# Altium PCB joystick_if.PcbDoc
Units mil, origin at the board's own origin, x right, y up, seen from the top; angles counter-clockwise.
Board outline 744.09 x 629.92 mil, 2 copper layers (Top Layer, Bottom Layer), stack 27.1 mil thick; 14 components, 8 nets, 53 pads, 18 vias.
Unrouted connection lines stored in the file: 2.
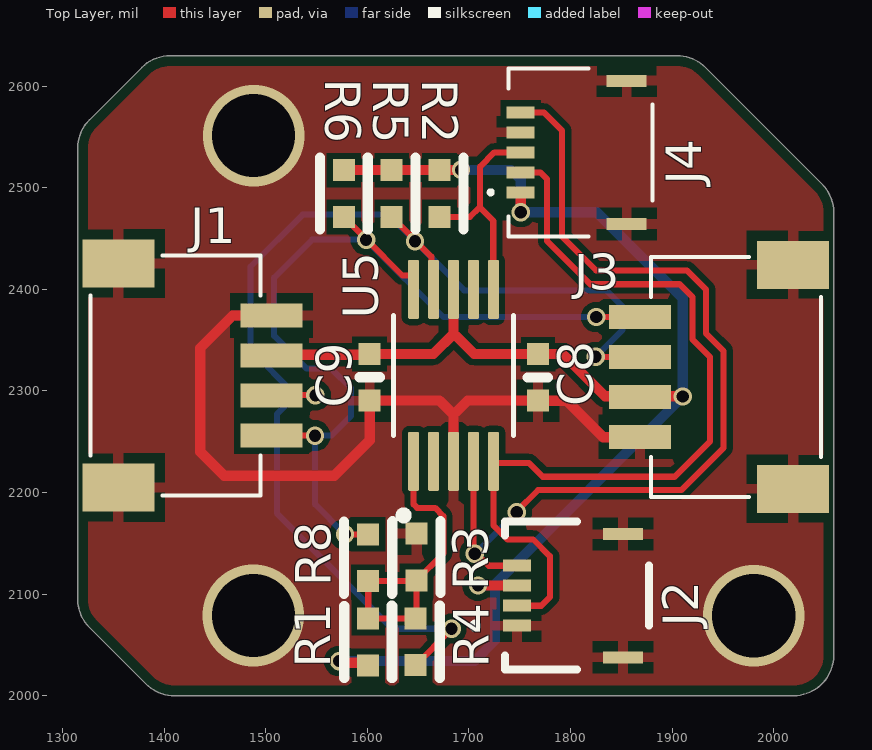
[diagram p0: Top Layer view]
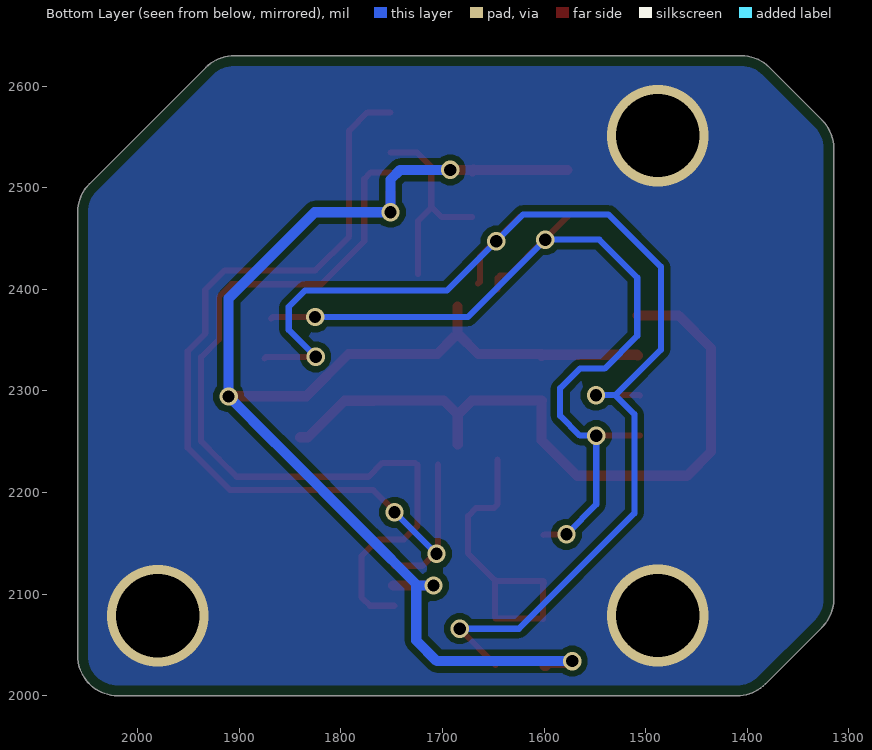
[diagram p1: Bottom Layer view, seen from below]
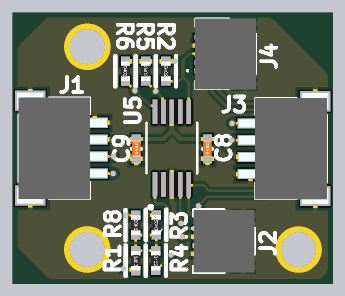
[diagram p2: 3D render of the assembled board from above, using the file's embedded part models]

## Layer stack, top to bottom
Top Solder: solder mask 0.4, Solder Resist, Dk 3.5
Top Layer: signal copper 1.4
Dielectric 2: prepreg 4.3, PP-006, Dk 4.1
Dielectric 1: dielectric 15.7, FR-4, Dk 4.4
Dielectric 3: prepreg 4.3, PP-006, Dk 4.1
Bottom Layer: signal copper 1.4
Bottom Solder: solder mask 0.4, Solder Resist, Dk 3.5

## Board outline
1326.49,2067.21 cw(c1354.33,2095.05) 1314.96,2095.05 1314.96,2538.81 cw(c1354.33,2538.81) 1326.49,2566.65 1378.23,2618.39 cw(c1406.07,2590.55) 1406.07,2629.92 1904.95,2629.92 cw(c1904.95,2590.55) 1932.79,2618.39 2047.52,2503.66 cw(c2019.69,2475.82) 2059.06,2475.82 2059.06,2039.37 cw(c2019.68,2039.37) 2019.68,2000 1410.01,2000 cw(c1410.01,2039.37) 1382.17,2011.53

## Design rules (kind name [scope] priority, off if disabled: settings)
BoardOutlineClearance [All] p1: gap=10 ignorepadtopadclearanceinfootprint=FALSE except(0: Arc-SplitContinuation Track-SplitContinuation SMDPad-SplitContinuation THPad-SplitContinuation Via-SplitContinuation Fill-SplitContinuation Poly-SplitContinuation Region-SplitContinuation Text-SplitContinuation)
Clearance [All] p1: gap=6 ignorepadtopadclearanceinfootprint=FALSE
ComponentClearance [All] p1: gap=10 collisioncheckmode=3 verticalgap=10 showdistances=FALSE donotcheckwithout3dbody=TRUE
DiffPairsRouting [All] p1: maxlimit=8 minlimit=4 mostfreqgap=5 toplayer_minwidth=5 toplayer_maxwidth=25 toplayer_prefwidth=9 bottomlayer_minwidth=5 bottomlayer_maxwidth=25 bottomlayer_prefwidth=9 maxuncoupledlength=500
HoleSize [All] p1: absolutevalues=TRUE maxlimit=100 minlimit=7 maxpercent=80.000 minpercent=20.000
MinimumSolderMaskSliver [All] p1: minsoldermaskwidth=0
PolygonConnect PolygonConnect_1 [All] p1: thpad.connectstyle=Relief thpad.reliefconductorwidth=10 thpad.reliefentries=4 thpad.polygonreliefangle="90 Angle" thpad.airgapwidth=10 smdpad.connectstyle=Relief smdpad.reliefconductorwidth=10 smdpad.reliefentries=4 smdpad.polygonreliefangle="90 Angle" smdpad.airgapwidth=10 via.connectstyle=Direct via.reliefconductorwidth=10 via.reliefentries=4 via.polygonreliefangle="90 Angle" via.airgapwidth=10
RoutingVias [All] p1: holewidth=8 width=50 viastyle="Through Hole" minholewidth=7 minwidth=10 maxholewidth=100 maxwidth=200
SilkToSilkClearance [All] p1: silktosilkclearance=1
SilkToSolderMaskClearance [IsPad] p1: minsilkscreentomaskgap=1 clearancetoexposedcopper=TRUE
SolderMaskExpansion [All] p1: expansion=4 istentingtop=FALSE
Width [All] p1: maxlimit=100 minlimit=4 preferedwidth=6 toplayer_minwidth=6 minimp=50.000000 maximp=50.000000 favimp=50.000000
24 further rules are at their usual default settings.

## Components (designator, comment, footprint, x,y, rotation, side; value= is the part's Value field where it differs from the comment)
C8 "1µF" SMD-0402C 1768.03,2313.31 r0 top
C9 "0.10µF" SMD-0402C 1602.29,2313.35 r0 top
J1 "SM04B-SRSS-TB(LF)(SN)" 4208 1327.92,2316.18 r270 top
J2 "5034800440" 5034800440 1806.46,2098.36 r90 top
J3 "SM04B-SRSS-TB(LF)(SN)" 4208 2046.21,2312.82 r90 top
J4 "5034800540" 5034800540 1810.12,2534.69 r90 top
R1 "0.0" SMD-0402-RES 1600.95,2052.72 r180 top
R2 "47k" SMD-0402-RES 1671.1,2494.25 r180 top
R3 "0.0" SMD-0402-RES 1648.45,2136.38 r0 top
R4 "0.0" SMD-0402-RES 1647.67,2053.07 r180 top
R5 "4.7k" SMD-0402-RES 1623.96,2494.25 r180 top
R6 "4.7k" SMD-0402-RES 1576.98,2494.22 r180 top
R8 "0.0" SMD-0402-RES 1600.64,2135.75 r0 top
U5 "ADS1015IDGST" SOP50P490X110-10N 1685.01,2315.25 r90 top

## Footprints (in the part's own frame and the unit in brackets; to place one, negate y for a bottom-side part, rotate by r counter-clockwise, add the part's x,y. Pads: shape width x height; smd on the part's side, far side on the other; paste and mask are expansions set on the pad)
4208 [mm]
  rect 0.6x1.55 smd: 1(-1.475,4.515) 2(-0.475,4.515) 3(0.525,4.515) 4(1.525,4.515)
  rect 1.2x1.8 smd: 5(-2.775,0.69) 6(2.825,0.69)
  silkscreen extent -2.97,-0.01 3.03,4.24, body extent -3.25,-0.09 3.31,5.23, height 3.15
5034800440 [mm]
  rect 0.3x0.7 smd: 1(-0.75,1.5) 2(-0.25,1.5) 3(0.25,1.5) 4(0.75,1.5)
  rect 0.3x1 smd: MP1(-1.54,-1.15) MP2(1.54,-1.15)
  silkscreen extent -1.85,-1.8 1.85,2.6, body extent -1.85,-1.8 1.85,1.82, height 2.22
5034800540 [mm]
  rect 0.3x0.7 smd: 1(-1,1.5) 2(-0.5,1.5) 3(0,1.5) 4(0.5,1.5) 5(1,1.5)
  rect 0.3x1 smd: MP1(-1.79,-1.15) MP2(1.79,-1.15)
  silkscreen extent -2.1,-1.8 2.1,2.3, body extent -2.1,-1.8 2.1,1.82, height 1.3
SMD-0402-RES [mm]
  rect 0.55x0.55 smd: 1(0,0.584) 2(0,-0.584)
  silkscreen extent -0.6,-0.9 0.6,0.9, body extent -0.28,-0.57 0.27,0.58, height 0.41
SMD-0402C [mm]
  rect 0.55x0.55 smd: 1(0,0.584) 2(0,-0.584)
  silkscreen extent -0.25,0 0.25,0, body extent -0.25,-0.51 0.25,0.51, height 0.51
SOP50P490X110-10N [mm]
  rrect25% 1.47x0.28 smd: 1(-2.15,1) 2(-2.15,0.5) 3(-2.15,0) 4(-2.15,-0.5) 5(-2.15,-1) 6(2.15,-1) 7(2.15,-0.5) 8(2.15,0) 9(2.15,0.5) 10(2.15,1)
  silkscreen extent -3.6,-1.5 1.5,1.5

## Part data
C8: library part GRM155R61A105KE15D, "CAP CER 1UF 10V X5R 0402", Digi-Key Part Number=490-3890-1-ND, Manufacturer="Murata Electronics North America", Operating Temperature="-55°C ~ 85°C", Package / Case="0402 (1005 Metric)", Ratings=-, Temperature Coefficient=X5R, Tolerance=±10%, Voltage=10V, @ qty=0, Applications="General Purpose", Datasheets=http://www.murata.com/~/media/webrenewal/support/library/catalog/products/capacitor/mlcc/c02e.pdf, Factory Stock=0, Features=-, Height - Seated (Max)=-, Image=//media.digikey.com/Renders/Murata%20Renders/ZRB-SERIES-0402.jpg, Lead Spacing=-, Lead Style=-, Minimum Quantity=1, Mounting Type="Surface Mount, MLCC", Packaging="Cut Tape (CT)", Part Number=GRM155R61A105KE15D, Part Status=Active, Quantity Available=6162668, Series=GRM, Size / Dimension="0.039\" L x 0.020\" W (1.00mm x 0.50mm)", Thickness (Max)="0.022\" (0.55mm)", Unit Price (USD)=0.1
C9: library part GRM152R61A104KE19D, "CAP CER 0.1UF 10V X5R 0402", Digi-Key Part Number=490-10008-1-ND, Manufacturer="Murata Electronics North America", Operating Temperature="-55°C ~ 85°C", Package / Case="0402 (1005 Metric)", Ratings=-, Temperature Coefficient=X5R, Tolerance=±10%, Voltage=10V, @ qty=0, Applications="General Purpose", Datasheets=http://www.murata.com/~/media/webrenewal/support/library/catalog/products/capacitor/mlcc/c02e.pdf, Factory Stock=0, Features="Derating Recommended", Height - Seated (Max)=-, Image=//media.digikey.com/Renders/Murata%20Renders/ZRB-SERIES-0402.jpg, Lead Spacing=-, Lead Style=-, Minimum Quantity=1, Mounting Type="Surface Mount, MLCC", Packaging="Cut Tape (CT)", Part Number=GRM152R61A104KE19D, Part Status=Active, Quantity Available=80241, Series=GRM, Size / Dimension="0.039\" L x 0.020\" W (1.00mm x 0.50mm)", Thickness (Max)="0.009\" (0.22mm)", Unit Price (USD)=0.16
J1 J3: library part 4208
R1 R3 R4 R8: library part ERJ-2GE0R00X, "RES SMD 0.0OHM JUMPER 1/10W 0402", Digi-Key Part Number=P0.0JCT-ND, Manufacturer="Panasonic Electronic Components", Operating Temperature="-55°C ~ 155°C", Package / Case="0402 (1005 Metric)", Power (Watts)="0.1W, 1/10W", Supplier Device Package=0402, Temperature Coefficient=-, Tolerance=Jumper, @ qty=1500, Composition="Thick Film", Datasheets=http://industrial.panasonic.com/www-cgi/jvcr13pz.cgi?E+PZ+3+AOA0001+ERJ2GE0R00X+7+WW, Factory Stock=0, Failure Rate=-, Features="Automotive AEC-Q200", Height - Seated (Max)="0.016\" (0.40mm)", Image=//media.digikey.com/Photos/Panasonic%20Photos/ERJ-PA2-Series.jpg, Minimum Quantity=1, Number of Terminations=2, Packaging="Cut Tape (CT)", Part Number=ERJ-2GE0R00X, Part Status=Active, Quantity Available=3152483, Series=ERJ, Size / Dimension="0.039\" L x 0.020\" W (1.00mm x 0.50mm)", Unit Price (USD)=0.00384
R2: library part ERJ-2GEJ473X, "RES SMD 47K OHM 5% 1/10W 0402", Digi-Key Part Number=P47KJCT-ND, Manufacturer="Panasonic Electronic Components", Operating Temperature="-55°C ~ 155°C", Package / Case="0402 (1005 Metric)", Power (Watts)="0.1W, 1/10W", Supplier Device Package=0402, Temperature Coefficient=±200ppm/°C, Tolerance=±5%, @ qty=1500, Composition="Thick Film", Datasheets=http://industrial.panasonic.com/www-cgi/jvcr13pz.cgi?E+PZ+3+AOA0001+ERJ2GEJ473X+7+WW, Factory Stock=0, Failure Rate=-, Features="Automotive AEC-Q200", Height - Seated (Max)="0.016\" (0.40mm)", Image=//media.digikey.com/Photos/Panasonic%20Photos/ERJ-PA2-Series.jpg, Minimum Quantity=1, Number of Terminations=2, Packaging="Cut Tape (CT)", Part Number=ERJ-2GEJ473X, Part Status=Active, Quantity Available=5182645, Series=ERJ, Size / Dimension="0.039\" L x 0.020\" W (1.00mm x 0.50mm)", Unit Price (USD)=0.00350
R5 R6: library part ERJ-2GEJ472X, "RES SMD 4.7K OHM 5% 1/10W 0402", Digi-Key Part Number=P4.7KJCT-ND, Manufacturer="Panasonic Electronic Components", Operating Temperature="-55°C ~ 155°C", Package / Case="0402 (1005 Metric)", Power (Watts)="0.1W, 1/10W", Supplier Device Package=0402, Temperature Coefficient=±200ppm/°C, Tolerance=±5%, @ qty=1500, Composition="Thick Film", Datasheets=http://industrial.panasonic.com/www-cgi/jvcr13pz.cgi?E+PZ+3+AOA0001+ERJ2GEJ472X+7+WW, Factory Stock=0, Failure Rate=-, Features="Automotive AEC-Q200", Height - Seated (Max)="0.016\" (0.40mm)", Image=//media.digikey.com/Photos/Panasonic%20Photos/ERJ-PA2-Series.jpg, Minimum Quantity=1, Number of Terminations=2, Packaging="Cut Tape (CT)", Part Number=ERJ-2GEJ472X, Part Status=Active, Quantity Available=8551774, Series=ERJ, Size / Dimension="0.039\" L x 0.020\" W (1.00mm x 0.50mm)", Unit Price (USD)=0.00350
U5: "12-Bit, 3.3kSPS, 4-Ch Delta-Sigma ADC With PGA, Oscillator, VREF, Comparator and I2C Interface 10-VSSOP -40 to 125", Package="VSSOP-10 Texas Instruments", Availability=Good, DigiKey-Purchase-URL=https://snapeda.com/shop?store=DigiKey&id=425936, MF="Texas Instruments", Mouser-Purchase-URL=https://snapeda.com/shop?store=Mouser&id=425936, MP=ADS1015IDGST, Price=None, SnapEDA_Link=https://www.snapeda.com/parts/ADS1015IDGST/Texas%20Instruments/view-part/425936/?ref=snap, Texas_Instruments-Purchase-URL=https://snapeda.com/shop?store=Texas+Instruments&id=425936

## Via types
v1: diameter 18, hole 12, Top Layer to Bottom Layer, tented both sides, 15 vias
v2: diameter 100, hole 82, Top Layer to Bottom Layer, 3 vias

## Nets (pads, with @x,y where several pads share a name; then routed paths per layer and width w, separated by ;. In a path a pad name is that pad's centre, name@x,y a point inside that pad or via, vN(x,y) a via of type N, cw(c..) or ccw(c..) an arc to the next point about the centre after c; other vN are vias at no path point)
GND: C8.2 C9.2 J1.1 J1.5 J1.6 J2.1 J2.MP1 J2.MP2 J3.1 J3.5 J3.6 J4.4 J4.MP1 J4.MP2 R3.1 U5.3 | length 705
  Top Layer w6: C8.2@1767.76,2290.58 C8.2
  Top Layer w10: J1.1@1507.75,2374.11 1467.54,2374.11 1435.62,2342.19 1435.62,2240.06 1459.18,2216.49 1567.54,2216.49 1602.48,2251.44 C9.2@1602.48,2287.2 ; C9.2 1671.2,2290.35 1685.01,2276.54 U5.3@1685.01,2247.4 ; 1686.98,2278.78 1698.78,2290.58 C8.2@1767.76,2290.58 ; C8.2 1796.35,2290.31 1832.29,2254.37 J3.1@1840.15,2254.37
  other v2: 1487.96,2078.91 1980.29,2078.74 1488.12,2551.26
JS_BTN: J4.3 R2.1 U5.6 | length 200.9
  Top Layer w6: R2.1 1701.1,2471.25 1710.58,2480.73 1724,2467.31 U5.6@1724,2415 ; 1710.99,2480.32 1710.99,2520.55 1725.14,2534.69 J4.3
JS_X: J2.4 J4.5 U5.4 | length 901.6
  Top Layer w6: U5.4@1704.52,2227.68 1704.52,2141.07 v1(1705.89,2139.7) 1707.72,2139.7 1719.53,2127.89 J2.4 ; v1@1746.65,2180.89 1768.05,2202.28 1909.01,2202.28 1950.66,2243.93 1950.66,2339.18 1933.51,2356.33 1933.51,2399.52 1914.45,2418.57 1825.16,2418.57 1791.84,2451.89 1791.84,2556.07 1773.85,2574.06 J4.5
  Bottom Layer w6: v1(1705.89,2139.7) 1706.1,2139.7 1746.89,2180.5 v1(1747.1,2180.5)
JS_Y: J2.2 J4.2 U5.5 | length 839.1
  Top Layer w6: U5.5@1724.38,2227.24 1724.38,2167.44 1737.99,2153.83 1763.11,2153.83 1779.77,2137.17 1779.77,2097.03 1771.26,2088.52 J2.2 ; U5.5@1726.93,2229.04 1759.08,2229.04 1772.69,2215.43 1902.53,2215.43 1919.93,2232.83 1937.52,2250.42 1937.52,2333.1 1919.93,2350.69 1919.93,2392.5 1907.48,2404.95 1819.5,2404.95 1777.01,2447.44 1777.01,2508.36 1770.37,2515.01 J4.2
NetR1_2: R1.2 R3.2 R4.2 R8.2 U5.1 | length 315.6
  Top Layer w6: R8.2@1599.94,2110.72 1600.95,2109.71 R1.2 ; R8.2 1646.47,2112.75 R3.2@1647.2,2113.49 ; R1.2@1602.7,2076.04 R4.2@1647.64,2076.04 ; U5.1@1645.67,2232.57 1645.67,2188.37 1649.18,2184.85 1666.75,2184.85 1674.82,2176.78 1674.82,2139.76 R3.2 R4.2@1648.45,2077.6
SCL: J1.4 J3.4 R6.1 R8.1 U5.10 | length 909.4
  Top Layer w6: J1.4 1505.91,2255.89 v1@1547.94,2255.89 ; R6.1 1599.14,2449.06 1634.64,2413.56 1643.13,2413.56 1645.64,2411.04 U5.10 ; v1(1578,2158.8) 1599.74,2158.8 R8.1@1600.48,2158.06 ; v1(1825.34,2372.6) 1867.2,2372.6 J3.4@1868.47,2371.34
  Bottom Layer w6: v1(1548.62,2255.89) 1548.62,2188.18 1577.4,2159.41 v1@1577.9,2159.41 ; v1@1549.03,2255.89 1564.72,2255.89 1584.14,2275.3 1584.14,2302.55 1564.75,2321.94 1540.44,2321.94 1508.26,2354.12 1508.26,2411.41 1545.64,2448.79 v1(1598.87,2448.79) ; v1@1601.19,2447.65 1601.19,2446.46 1675.05,2372.6 v1(1825.34,2372.6)
SDA: J1.3 J3.3 R4.1 R5.1 U5.9 | length 1218.4
  Top Layer w6: J1.3 1505.93,2295.74 v1@1547.36,2295.74 ; R5.1 1663.13,2432.07 1663.13,2407.43 U5.9@1664.85,2405.72 ; R4.1 v1@1682.26,2064.66 ; v1(1824.76,2333.51) 1873.66,2333.51 J3.3@1875.16,2332.01
  Bottom Layer w6: v1@1550.17,2296.23 1549.68,2295.74 v1(1548.92,2295.74) 1529.75,2295.74 ; v1(1647.09,2447.28) 1620.88,2473.5 1536.41,2473.5 1485.08,2422.17 1485.08,2340.41 1529.75,2295.74 ; v1@1649.66,2447.09 1649.66,2444.72 1695.47,2398.91 1835.15,2398.91 1851.3,2382.76 1851.3,2360.05 v1(1824.76,2333.51) ; v1@1684.61,2065.72 1684.44,2065.9 v1(1683.05,2065.9) 1624.7,2065.9 1511.1,2179.5 1511.1,2277.09 1529.75,2295.74
VDD_3V3: C8.1 C9.1 J1.2 J2.3 J3.2 J4.1 R1.1 R2.2 R5.2 R6.2 U5.8 | length 1545.8
  Top Layer w10: J1.2@1507.75,2334.74 1508.55,2335.55 1601.45,2335.55 C9.1@1602.64,2334.36 ; v1(1572.31,2034) 1573.84,2032.47 1595.13,2032.47 1598.18,2029.42 R1.1@1599.26,2029.42 ; R6.2 1668.57,2517.23 R2.2@1669.16,2517.83 ; C9.1 1665.03,2336.35 1685.05,2356.37 U5.8@1685.05,2382.84 ; R2.2@1670.59,2516.18 1671.78,2517.38 1692.23,2517.38 v1(1692.36,2517.5) ; 1686.19,2354.15 1687.27,2354.15 1705.14,2336.27 C8.1 ; v1(1708.9,2108.38) 1708.99,2108.29 1748.56,2108.29 J2.3@1748.64,2108.38 ; v1(1751.08,2475.82) 1751.07,2495.59 J4.1@1751.2,2495.72 ; C8.1 1792.45,2336.31 1834.03,2294.72 1911.01,2294.72 v1@1911.6,2294.14
  Bottom Layer w10: v1(1572.31,2034) 1705.5,2034 1725.74,2054.24 1725.74,2108.07 1725.43,2108.38 v1(1708.9,2108.38) ; v1(1692.36,2517.5) 1741.63,2517.5 1751.08,2508.06 1751.08,2476.04 v1@1750.96,2475.92 ; 1726.51,2110.42 1772.5,2156.41 1772.5,2156.5 1864.38,2248.38 1864.47,2248.38 v1(1910.46,2294.37) 1910.46,2391.17 1825.81,2475.82 v1(1751.08,2475.82)
pads on no net: U5.2 U5.7

## Polygon pours and split planes (outlines as drawn)
GND on Top Layer "NONET_L-01_P-001" (solid, pour order 5): 1284.71,2663.74 1297.14,2651.3 2074.72,2651.3 2074.72,1977.79 1292.56,1977.79 1292.56,2653.92 1291.91,2654.57
GND on Top Layer "NONET_L-01_P-001" (solid, pour order 2): 3533.17,4644.42 4538.88,4644.42 4542.67,4640.62 4542.67,1923.33 3523.05,1923.33 3520.52,1920.8 3520.52,4649.48
GND on Bottom Layer "NONET_L-01_P-001" (solid, pour order 6): 1284.71,2663.74 1297.14,2651.3 2074.72,2651.3 2074.72,1977.79 1292.56,1977.79 1292.56,2653.92 1291.91,2654.57
GND on Bottom Layer "NONET_L-01_P-001" (solid, pour order 4): 3533.17,4644.42 4538.88,4644.42 4542.67,4640.62 4542.67,1923.33 3523.05,1923.33 3520.52,1920.8 3520.52,4649.48

## Silkscreen, mask and mechanical layers (free items; w line width, h text height)
Mechanical 1:
  circle w0.5: c3676.28,4454.12 r59.06
  circle w0.5: c3676.28,4454.12 r39.37
  circle w0.5: c3918.56,4280.9 r59.06
  circle w0.5: c3918.56,4280.9 r39.37
  circle w0.5: c3918.56,3572.23 r59.06
  circle w0.5: c3918.56,3572.23 r39.37
  circle w0.5: c3918.56,2956.68 r39.37
  circle w0.5: c3918.56,2956.68 r59.06
  circle w0.5: c3918.56,2248.03 r39.37
  circle w0.5: c3918.56,2248.03 r59.06
  circle w0.5: c3676.28,2090.55 r39.37
  circle w0.5: c3676.28,2090.55 r59.06
Outline:
  circle w0.5: c1488.19,2551.18 r39.37
  circle w0.5: c1488.19,2078.74 r39.37
  circle w0.5: c1980.32,2078.74 r39.37
  lines w0.5: 1881.89,2049.21 1881.89,2147.64 ; 1881.89,2472.44 1881.89,2590.55 ; 1314.96,2095.05 ccw(c1354.33,2095.05) 1326.49,2067.21 ; 1314.96,2095.05 ccw(c1354.33,2095.05) 1326.49,2067.21 ; 1314.96,2095.05 1314.96,2538.81 ; 1314.96,2095.05 1314.96,2538.81 ; 1314.96,2538.81 cw(c1354.33,2538.81) 1326.49,2566.65 ; 1314.96,2538.81 cw(c1354.33,2538.81) 1326.49,2566.65 ; 1326.49,2067.21 1382.17,2011.53 ; 1326.49,2067.21 1382.17,2011.53 ; 1326.49,2566.65 1378.23,2618.39 ; 1326.49,2566.65 1378.23,2618.39 ; 1378.23,2618.39 cw(c1406.07,2590.55) 1406.07,2629.92 ; 1378.23,2618.39 cw(c1406.07,2590.55) 1406.07,2629.92 ; 1382.17,2011.53 ccw(c1410.01,2039.37) 1410.01,2000 ; 1382.17,2011.53 ccw(c1410.01,2039.37) 1410.01,2000 ; 1406.07,2629.92 1904.95,2629.92 ; 1406.07,2629.92 1904.95,2629.92 ; 1410.01,2000 2019.68,2000 ; 1410.01,2000 2019.68,2000 ; 1904.95,2629.92 cw(c1904.95,2590.55) 1932.79,2618.39 ; 1904.95,2629.92 cw(c1904.95,2590.55) 1932.79,2618.39 ; 1932.79,2618.39 2047.52,2503.66 ; 1932.79,2618.39 2047.52,2503.66 ; 2019.68,2000 ccw(c2019.68,2039.37) 2059.06,2039.37 ; 2019.68,2000 ccw(c2019.68,2039.37) 2059.06,2039.37 ; 2047.52,2503.66 cw(c2019.69,2475.82) 2059.06,2475.82 ; 2047.52,2503.66 cw(c2019.69,2475.82) 2059.06,2475.82 ; 2059.06,2039.37 2059.06,2475.82 ; 2059.06,2039.37 2059.06,2475.82 ; 1479.92,2251.38 1479.92,2259.26 1507.48,2259.26 1507.48,2251.38 1479.92,2251.38 ; 1479.92,2290.75 1479.92,2298.63 1507.48,2298.63 1507.48,2290.75 1479.92,2290.75 ; 1479.92,2330.12 1479.92,2338 1507.48,2338 1507.48,2330.12 1479.92,2330.12 ; 1479.92,2369.49 1479.92,2377.37 1507.48,2377.37 1507.48,2369.49 1479.92,2369.49 ; 1742.13,2065.94 1742.13,2071.85 1750,2071.85 1750,2065.94 1742.13,2065.94 ; 1742.13,2085.63 1742.13,2091.54 1750,2091.54 1750,2085.63 1742.13,2085.63 ; 1742.13,2105.32 1742.13,2111.22 1750,2111.22 1750,2105.32 1742.13,2105.32 ; 1742.13,2125 1742.13,2130.91 1750,2130.91 1750,2125 1742.13,2125 ; 1742.13,2489.17 1742.13,2495.08 1750,2495.08 1750,2489.17 1742.13,2489.17 ; 1742.13,2508.86 1742.13,2514.76 1750,2514.76 1750,2508.86 1742.13,2508.86 ; 1742.13,2528.54 1742.13,2534.45 1750,2534.45 1750,2528.54 1742.13,2528.54 ; 1742.13,2548.23 1742.13,2554.13 1750,2554.13 1750,2548.23 1742.13,2548.23 ; 1742.13,2567.91 1742.13,2573.82 1750,2573.82 1750,2567.91 1742.13,2567.91 ; 1862.59,2251.38 1862.59,2259.26 1890.15,2259.26 1890.15,2251.38 1862.59,2251.38 ; 1862.59,2290.75 1862.59,2298.63 1890.15,2298.63 1890.15,2290.75 1862.59,2290.75 ; 1862.59,2330.12 1862.59,2338 1890.15,2338 1890.15,2330.12 1862.59,2330.12 ; 1862.59,2369.49 1862.59,2377.37 1890.15,2377.37 1890.15,2369.49 1862.59,2369.49